# Altium PCB main.PcbDoc
Units mm, origin at the board's own origin, x right, y up, seen from the top; angles counter-clockwise.
Board outline 50 x 70 mm, 2 copper layers (Top Layer, Bottom Layer); 57 components, 51 nets, 162 pads, 66 vias.
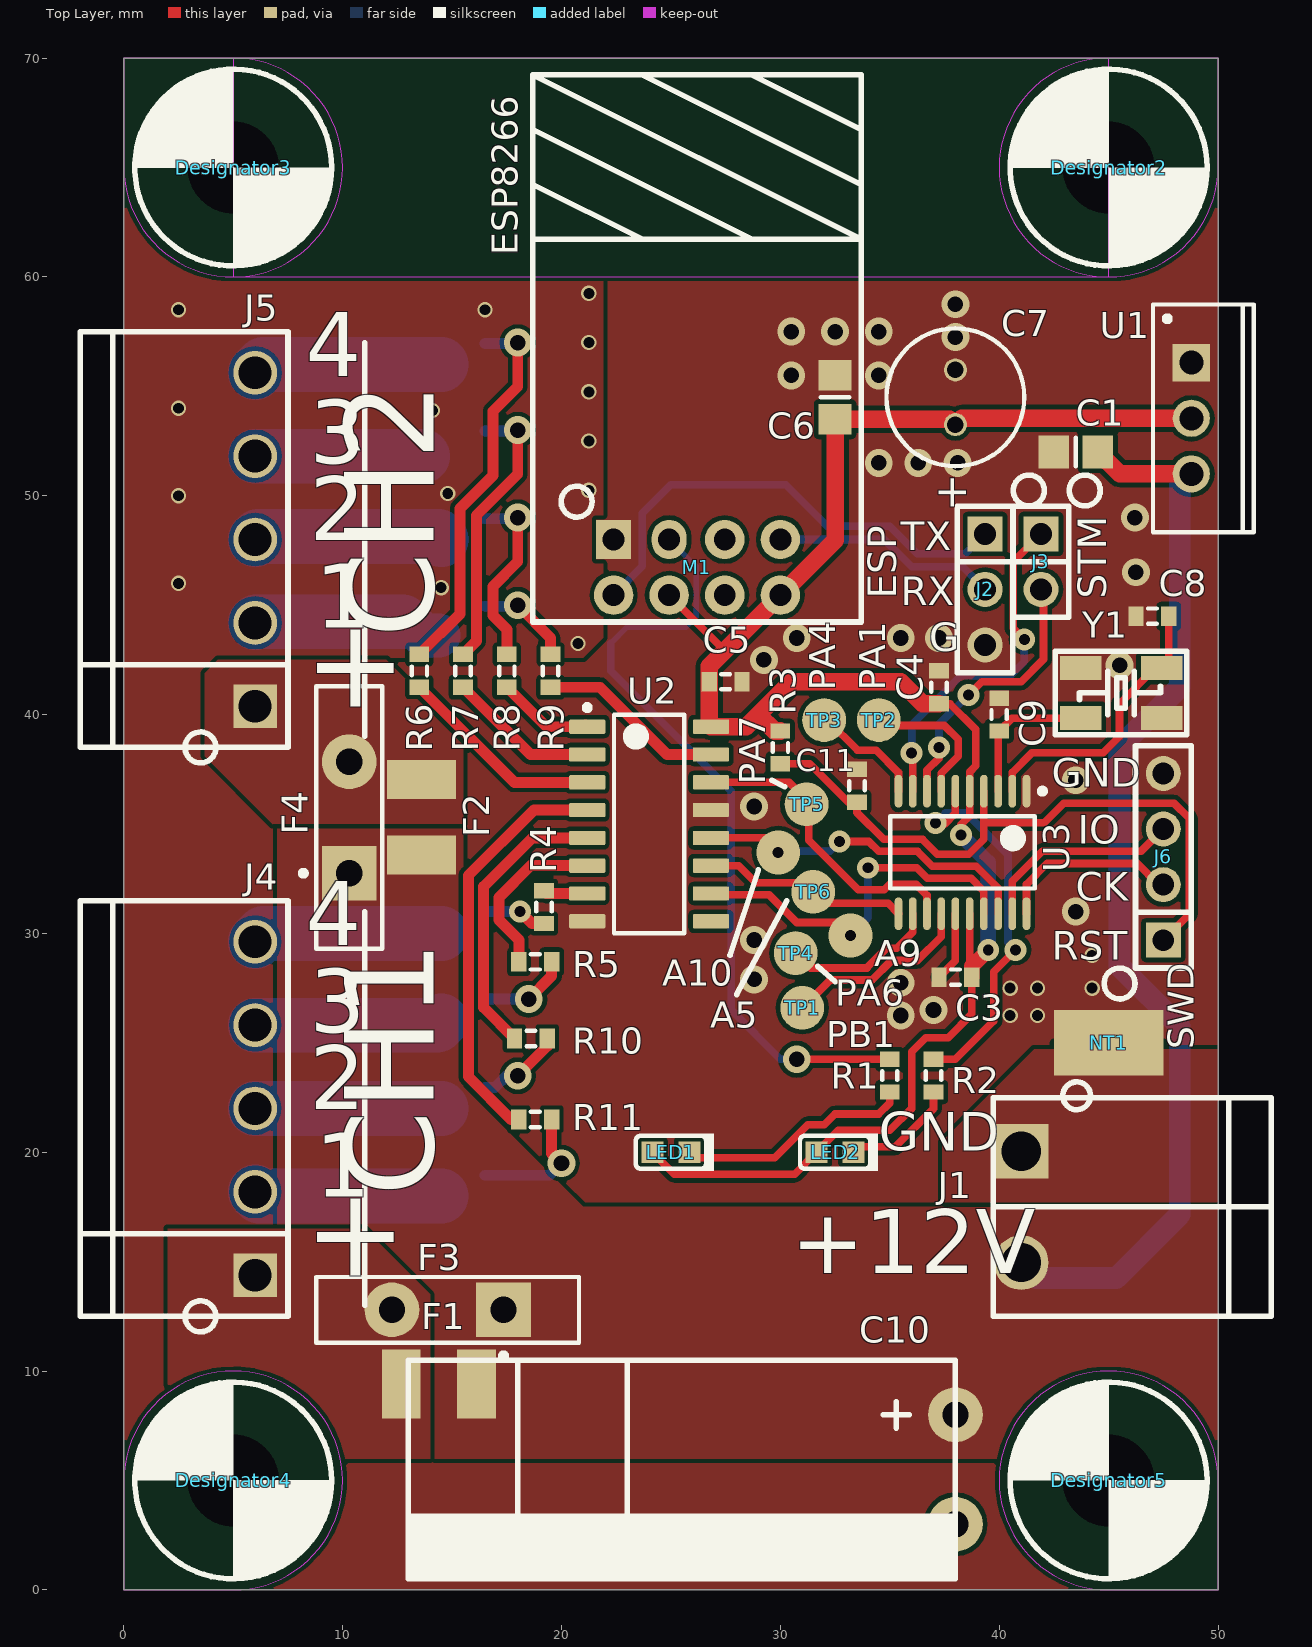
[diagram p0: Top Layer view]
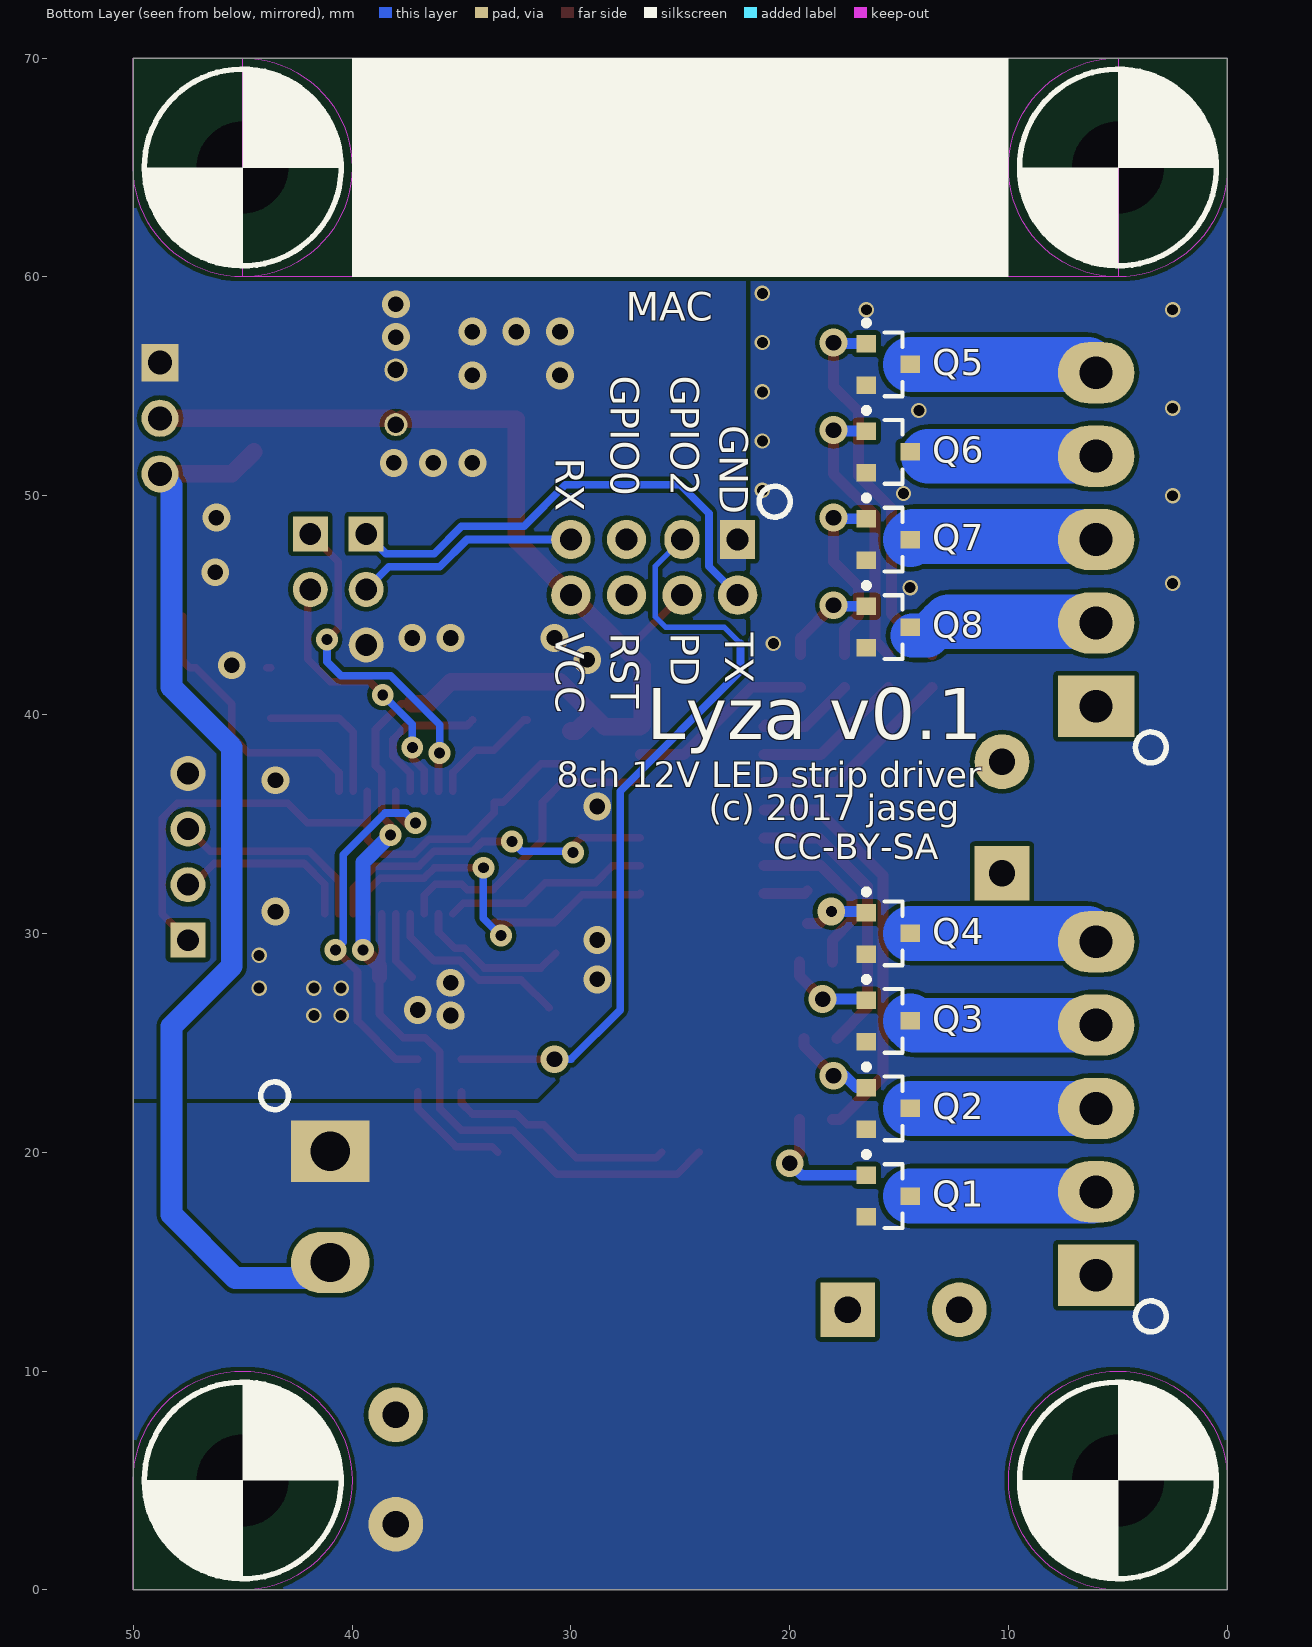
[diagram p1: Bottom Layer view, seen from below]

## Layer stack, top to bottom
Top Solder: solder mask 0.0102, Solder Resist, Dk 3.5
Top Layer: signal copper 0.0356
Dielectric 1: dielectric 0.32, FR-4, Dk 4.8
Bottom Layer: signal copper 0.0356
Bottom Solder: solder mask 0.0102, Solder Resist, Dk 3.5

## Board outline
0,0 0,70 50,70 50,0

## Design rules (kind name [scope] priority, off if disabled: settings)
Clearance [All] p1: gap=0.203 ignorepadtopadclearanceinfootprint=TRUE except(0: Arc-Hole Track-Hole SMDPad-Hole THPad-Hole Via-Hole Fill-Hole Poly-Hole Region-Hole Text-Hole)
ComponentClearance [All] p1 off: gap=0.254 collisioncheckmode=3 verticalgap=0.254 showdistances=FALSE
HoleSize [All] p1: absolutevalues=TRUE maxlimit=5 minlimit=0.025 maxpercent=80.000 minpercent=20.000
MinimumSolderMaskSliver [All] p1 off: minsoldermaskwidth=0.254
PolygonConnect PolygonConnect_Power [All vs InNetClass('power')] p1: connectstyle=Direct reliefconductorwidth=0.254 reliefentries=4 polygonreliefangle="90 Angle" airgapwidth=0.254
PolygonConnect [All] p2: connectstyle=Relief reliefconductorwidth=0.254 reliefentries=4 polygonreliefangle="90 Angle" airgapwidth=0.254
RoutingVias [All] p1: holewidth=0.711 width=1.27 viastyle="Through Hole" minholewidth=0.3 minwidth=0.5 maxholewidth=2 maxwidth=2.54
SilkToSilkClearance [All] p1 off: silktosilkclearance=0.254
SilkToSolderMaskClearance [IsPad] p1 off: minsilkscreentomaskgap=0.254 clearancetoexposedcopper=TRUE
SolderMaskExpansion [All] p1: expansion=0.102
Width [All] p1: maxlimit=5 minlimit=0.152 preferedwidth=0.254
25 further rules are at their usual default settings.

## Classes and differential pairs
component class main: C1 C3 C4 C5 C6 C7 C8 C9 C10 C11 F1 F2 F3 F4 J1 J2 J3 J4 J5 J6 LED1 LED2 M1 NT1 Q1 Q2 Q3 Q4 Q5 Q6 Q7 Q8 R1 R2 R3 R4 R5 R6 R7 R8 R9 R10 R11 TP1 TP2 TP3 TP4 TP5 TP6 U1 U2 U3 Y1
net class power: +12V FUSED1 FUSED2 GND PGND

## Components (designator, comment, footprint, x,y, rotation, side; value= is the part's Value field where it differs from the comment)
C1 "10u" 6-0805_M 43.5,52 r180 top
C3 "100n" J1-0603 38,28 r180 top
C4 "100n" J1-0603 37.25,41.25 r90 top
C5 "100n" J1-0603 27.5,41.5 r0 top
C6 "1u" 6-0805_M 32.5,54.5 r90 top
C7 "100u" FHTE-8-AA07-2_L 38,54.5 r270 top
C8 "22p" J1-0603 47,44.5 r0 top
C9 "22p" J1-0603 40,40 r90 top
C10 "1000/25" ELKO_10MM_RM5_SIDE_25MM 38,5.5 r270 top
C11 "47n" J1-0603 33.5,36.75 r90 top
Designator2 "Comment" M4_SCREW 45,65 r0 top
Designator3 "Comment" M4_SCREW 5,65 r0 top
Designator4 "Comment" M4_SCREW 5,5 r0 top
Designator5 "Comment" M4_SCREW 45,5 r0 top
F1 "1812L260" LFUS-FUSE1812-71_V 14.4,9.4 r180 top
F2 "1812L260" LFUS-FUSE1812-71_V 13.6,35.3 r90 top
F3 "MF-R185" BOUR-MF-R185 14.8,12.8 r180 top
F4 "MF-R185" BOUR-MF-R185 10.3,35.3 r90 top
J1 "2P5.08MM" HEADER_2PIN_RM5.08MM_PLUGGABLE 41,17.5 r0 top
J2 "PINHD_1x3_2.54MM" PINHD_3X1_2.54MM 39.356,45.72 r0 top
J3 "PINHD_1x2_2.54MM" PINHD_2X1_2.54MM 41.91,46.99 r0 top
J4 "5PIN3.81MM" HEADER_5PIN_RM3.81MM_PLUGGABLE 6,22 r180 top
J5 "5PIN3.81MM" HEADER_5PIN_RM3.81MM_PLUGGABLE 6,48 r180 top
J6 "SWD" PINHD_4X1_2.54MM 47.5,33.5 r180 top
LED1 "KP-1608MGC" KING-0603LED_GREEN_V 25,20 r180 top
LED2 "KP-1608MGC" KING-0603LED_GREEN_V 32.5,20 r180 top
M1 "ESP-01" ESP01 26.19,46.73 r90 top locked
NT1 "NETTIE" NETTIE 45,25 r180 top
Q1 "IRLML6244TRPbF" ONSC-SOT-23-3-318-08_V 15.5,18 r180 bottom
Q2 "IRLML6244TRPbF" ONSC-SOT-23-3-318-08_V 15.5,22 r180 bottom
Q3 "IRLML6244TRPbF" ONSC-SOT-23-3-318-08_V 15.5,26 r180 bottom
Q4 "IRLML6244TRPbF" ONSC-SOT-23-3-318-08_V 15.5,30 r180 bottom
Q5 "IRLML6244TRPbF" ONSC-SOT-23-3-318-08_V 15.5,56 r180 bottom
Q6 "IRLML6244TRPbF" ONSC-SOT-23-3-318-08_V 15.5,52 r180 bottom
Q7 "IRLML6244TRPbF" ONSC-SOT-23-3-318-08_V 15.5,48 r180 bottom
Q8 "IRLML6244TRPbF" ONSC-SOT-23-3-318-08_V 15.5,44 r180 bottom
R1 "180" J1-0603 35,23.5 r270 top
R2 "180" J1-0603 37,23.5 r270 top
R3 "47k" J1-0603 30,38.5 r90 top
R4 "180" J1-0603 19.2,31.2 r90 top
R5 "180" J1-0603 18.8,28.7 r180 top
R6 "180" J1-0603 13.5,42 r270 top
R7 "180" J1-0603 15.5,42 r270 top
R8 "180" J1-0603 17.5,42 r270 top
R9 "180" J1-0603 19.5,42 r270 top
R10 "180" J1-0603 18.6,25.2 r180 top
R11 "180" J1-0603 18.8,21.5 r180 top
TP1 "PB1" TESTPOINT_2mm 31,26.6 r0 top
TP2 "PA1" TESTPOINT_2mm 34.5,39.75 r0 top
TP3 "PA4" TESTPOINT_2mm 32,39.75 r0 top
TP4 "PA6" TESTPOINT_2mm 30.7,29.1 r0 top
TP5 "PA6" TESTPOINT_2mm 31.2,35.9 r0 top
TP6 "PA6" TESTPOINT_2mm 31.5,31.9 r0 top
U1 "LD1117AV33" TO220 48.779,53.54 r270 top
U2 "SN74HC595DR" D0016A_M 24,35 r0 top
U3 "STM32F030F4P6" STM-TSSOP20_L 38.325,33.7 r270 top
Y1 "ABM3B-8.0000MHZ-B2-T" XTAL_MJ_5x3.2 45.571,40.988 r180 top

## Footprints (in the part's own frame and the unit in brackets; to place one, negate y for a bottom-side part, rotate by r counter-clockwise, add the part's x,y. Pads: shape width x height; smd on the part's side, far side on the other; paste and mask are expansions set on the pad)
6-0805_M [mm] "Chip Resistor, Body 2.0x1.2mm, IPC Low Density"
  rect 1.4x1.5 smd: 1(-1,0) 2(1,0)
  silkscreen extent 0,-0.65 0,0.65, body extent -1.07,-0.7 1.07,0.7, height 0.7
BOUR-MF-R185 [mm] "THD, 2-Leads, Body 12x3mm"
  rect 2.5x2.5 hole 1.2: 1(-2.55,0)
  round 2.5 hole 1.2: 2(2.55,0)
  silkscreen extent -6,-1.5 6,2.22, body extent -6,-1.48 6,1.52, height 18.4
D0016A_M [mm] "SOIC, 16-Leads, Body 10x4mm, Pitch 1.27mm, IPC Low Density"
  rrect15% 1.65x0.65 smd: 1(-2.825,4.445) 2(-2.825,3.175) 3(-2.825,1.905) 4(-2.825,0.635) 5(-2.825,-0.635) 6(-2.825,-1.905) 7(-2.825,-3.175) 8(-2.825,-4.445) 9(2.825,-4.445) 10(2.825,-3.175) 11(2.825,-1.905) 12(2.825,-0.635) 13(2.825,0.635) 14(2.825,1.905) 15(2.825,3.175) 16(2.825,4.445)
  silkscreen extent -2.95,-5 1.6,5.44, body extent -3,-4.95 3,4.95, height 1.59
ELKO_10MM_RM5_SIDE_25MM [mm]
  round 2.5 hole 1.2: 1(-2.5,0) 2(2.5,0)
  silkscreen extent -5,-25 5,0
ESP01 [mm] "ESP-01 ESP8266 Wifi Module"
  rect 1.8x1.6 hole 1: 1(1.27,3.81)
  round 1.8 hole 1: 2(-1.27,3.81) 4(-1.27,1.27) 5(1.27,-1.27) 6(-1.27,-1.27) 7(1.27,-3.81) 8(-1.27,-3.81)
  oval 1.8x1.6 hole 1: 3(1.27,1.27)
  silkscreen extent -2.5,-7.5 22.5,7.5
FHTE-8-AA07-2_L [mm] "Through Hole Cap, 2-Leads, Dia 6.3mm, Body Length 7mm, IPC High Density"
  round 1.05 hole 0.75: 1(1.25,0) 2(-1.25,0)
  silkscreen extent -3.15,-3.15 3.15,3.15, body extent -3.15,-3.16 3.15,3.16, height 7
HEADER_2PIN_RM5.08MM_PLUGGABLE [mm] "Pluggable Header 2 pin RM 5.08mm"
  rect 2.5x2.5 / inner round 3.6 / far side rect 3.6x2.8 hole 1.8: 1(0,2.54)
  round 2.5 / inner round 3.6 / far side oval 3.6x2.8 hole 1.8: 2(0,-2.54)
  silkscreen extent -1.27,-5 11.43,5.71
HEADER_5PIN_RM3.81MM_PLUGGABLE [mm] "Pluggable Header 5 pin RM 3.81mm"
  rect 2x2 / inner oval 4x3 / far side rect 3.5x2.8 hole 1.5: 1(0,7.62)
  round 2 / inner oval 4x3 / far side oval 3.5x2.8 hole 1.5: 2(0,3.81) 3(0,0) 4(0,-3.81) 5(0,-7.62)
  silkscreen extent -1.5,-9.5 8,10.21
J1-0603 [mm] "Chip Resistor, Body 1.6x0.8mm, IPC High Density"
  rect 0.7x0.9 smd: 1(-0.75,0) 2(0.75,0)
  silkscreen extent -0.2,-0.35 0.2,0.35, body extent -0.85,-0.48 0.85,0.48, height 0.9
KING-0603LED_GREEN_V [mm] "SMT LED, 2-Leads, Body 1.6x0.8mm (0603-Size)"
  rect 1x1 smd paste+0 mask+0: 1(0.85,0) 2(-0.85,0)
  silkscreen extent -1.97,-0.85 1.6,0.85, body extent -0.92,-0.53 1.09,0.53, height 1.1
LFUS-FUSE1812-71_V [mm] "Chip Fuse, Body 4.73x3.41mm, Height 0.71mm"
  rect 1.78x3.15 smd: 1(-1.725,0) 2(1.725,0)
  body extent -1.73,-1.57 1.73,1.57, height 0.71
M4_SCREW [mm] "Hole for M4 screw with head"
  round 0 hole 4.2 unplated: 1(0,0)
  silkscreen extent -4.5,-4.5 4.5,4.5
NETTIE [mm] "Net tie"
  rect 5x1.5 smd: 1(0,0.75)
  rect 5x1.5 smd paste-50 mask-50: 2(0,-0.75)
ONSC-SOT-23-3-318-08_V [mm] "SOT23, 3-Leads, Body 2.92x1.3mm, Pitch 0.95mm"
  rect 0.9x0.8 smd: 1(-1,0.95) 2(-1,-0.95) 3(1,0)
  silkscreen extent -1.13,-1.46 0.65,2.02, body extent -0.65,-1.46 0.65,1.46, height 1.11
PINHD_2X1_2.54MM [mm] "Pin Header 1 row 2 pin RM 2.54mm"
  rect 1.6x1.6 hole 1: 1(0,1.27)
  round 1.6 hole 1: 2(0,-1.27)
  silkscreen extent -1.27,-2.54 2.71,3.96
PINHD_3X1_2.54MM [mm] "Pin Header 1 row 3 pin RM 2.54mm"
  rect 1.6x1.6 hole 1: 1(0,2.54)
  round 1.6 hole 1: 2(0,0) 3(0,-2.54)
  silkscreen extent -1.27,-3.81 2.71,5.23
PINHD_4X1_2.54MM [mm] "Pin Header 1 row 4 pin RM 2.54mm"
  rect 1.6x1.6 hole 1: 1(0,3.81)
  round 1.6 hole 1: 2(0,1.27) 3(0,-1.27) 4(0,-3.81)
  silkscreen extent -1.27,-5.08 2.7,6.5
STM-TSSOP20_L [mm] "SOP, 20-Leads, Body 6.6x4.5mm, Pitch 0.65mm, IPC High Density"
  oval 1.5x0.35 smd: 1(-2.8,2.925) 2(-2.8,2.275) 3(-2.8,1.625) 4(-2.8,0.975) 5(-2.8,0.325) 6(-2.8,-0.325) 7(-2.8,-0.975) 8(-2.8,-1.625) 9(-2.8,-2.275) 10(-2.8,-2.925) 11(2.8,-2.925) 12(2.8,-2.275) 13(2.8,-1.625) 14(2.8,-0.975) 15(2.8,-0.325) 16(2.8,0.325) 17(2.8,0.975) 18(2.8,1.625) 19(2.8,2.275) 20(2.8,2.925)
  silkscreen extent -2.92,-3.3 1.65,3.78, body extent -2.25,-3.3 2.25,3.3, height 1.2
TESTPOINT_2mm [mm] "Testpoint SMD 2mm dia"
  round 2 smd: 1(0,0)
TO220 [mm] "TO, Thru-Hole, Vertical, Heatsink Mounted; 3 In-Line Leads; Pitch 2.54 mm"
  rect 1.7x1.7 hole 1.1: 1(-2.54,0)
  round 1.7 hole 1.1: 2(0,0) 3(2.54,0)
  silkscreen extent -5.2,-1.75 5.2,2.85, body extent -5.25,-1.8 5.25,2.9, height 19.7
XTAL_MJ_5x3.2 [mm]
  rect 1.9x1.1 smd: 1(-1.85,-1.15) 2(1.85,-1.15) 3(1.85,1.15) 4(-1.85,1.15)
  silkscreen extent -3,-1.9 3,1.9

## Part data
C1 C3 C4 C5 C6 C8 C9 C11: library part C, "Capacitor"
C7: library part CMP-0909-00002-1, "Aluminum Electrolytic Capacitor, 470 uF +/- 5%, 16 V, -40 to 105 degC, 2 Pin THD, Dia 6.3 mm, Body Length 7 mm, Tape and Reel", Manufacturer="Fenghuang Technology", Nominal Capacitance="470 uF", Operating Temperature="-40 to 105 degC", PartNumber=8471LCJAA07WPN081T, Seeve Color=Balck, Tolerance="+/- 5%", Voltage="16 V", ComponentLink1Description="Manufacturer URL", ComponentLink1URL=http://www.fenghua-advanced.com/, ComponentLink2Description=Datasheet, ComponentLink2URL=http://218.15.223.226:8089/BusinessProductPdf/ss_20130228152314.pdf, DatasheetVersion=Feb-13, Mounting Technology="Through Hole", PackageDescription="2-Pin Through Hole Cap, Dia 6.3 mm, Body Length 7 mm", PackageReference=8-AA07-2, Packing="Tape and Reel"
C10: library part ELKO, Mfg Part No=EEUFR1E102B, Mfg=Panasonic
F1 F2: library part CMP-0257-00001-1, "Resettable PTC, 1812, 1.5 A Ihold, 3.0 A Itrip", PartNumber=1812L150ZR, ComponentLink1Description="Manufacturer URL", ComponentLink1URL=http://www.littelfuse.com/, ComponentLink2Description=Datasheet, ComponentLink2URL=http://www.littelfuse.com/products/resettable-ptcs/surface-mount/1812l/~/media/Electronics_Technical/Datasheets/Resettable_PTCs/Littelfuse_PTC_1812L_Datasheet.pdf, DatasheetVersion=6/2012, Ihold="1.5 A", Imax="100 A", Itrip="3 A", PackageDescription="2-Pin SMT Fuse, 4.55 x 3.24 mm Body", PackageReference=FUSE1812-71, PackageVersion=6/2012, Vmax="8 Vdc"
F3 F4: library part CMP-2000-06695-1, "PTC Resettable Fuse, 30 V, 40 A, -40 to 85 degC, 2-Pin THD, RoHS, Bulk", Hold Current=1.85A, Manufacturer=Bourns, Maximum Current Rating=40A, Maximum Initial Resistance=0.07Ohm, Maximum Post Trip Resistance=0.11Ohm, Maximum Voltage Rating=30V, Minimum Initial Resistance=0.04Ohm, Operating Temperature=-40to85C, Package/Case=N/A, Package Description="2-Pin Through Hole Device, Body 12 x 3 mm", Trip Current=3.7A, Typical Power Dissipation=1W, Agency Approvals=CSA/TUV/UL, Applications=AutomotiveApplications,ComputersandPeripherals,GeneralElectronics, COO=CN, Datasheet URL=http://www.bourns.com/docs/Product-Datasheets/mfr.pdf, Datasheet Version=08/2015, Dimension=3(Max)x12(Max)mm, ECCN=EAR99, Family=MF-R, HTS=8536100040, Lead Diameter=0.51mm, Manufacturer URL=http://www.bourns.com/, Maximum Trip Time=8.7@9.25As, Mounting=ThroughHole, Mounting Technology=ThroughHole, Number of Terminals=2, Package Reference=MF-R185, Packaging=Bulk, Part No=MF-R185, RoHS=Yes, Seated Plane Height=18.4(Max)mm, Supplier=Bourns, Supplier Standard Pack=500, Terminal Pitch=5.1(Nom)mm, Wire Form=InsideCrimpStandoff
J1: library part PHD2P5.08RM, "Pluggable Header 2 Pin RM 5.08mm ~15A"
J2: library part PINHD1X3, "Pin Header 1 row 3 pin RM 2.54mm"
J3: library part PINHD1X2, "Pin Header 1 row 2 pin RM 2.54mm"
J4 J5: library part PHD5P3.81RM, "Pluggable Header 5 Pin RM 3.81mm ~8A"
J6: library part PH_4x1, "Pin Header 4x1 pin"
LED1 LED2: library part CMP-0404-00001-1, "LED, SMT, 0603(1608), 1.1mm thickness, Green", Forward Current="30 mA", Manufacturer=Kingbright, Power Dissipation="75 mW", Reverse Voltage="5 V", Storage Temperature="-40 to +85 degC", ComponentLink1Description="Manufacturer URL", ComponentLink1URL=http://www.kingbright.com/, Mounting Technology="Surface Mount", PackageDescription="2-Pin SMT LED, 1.6 x 0.8 mm Pitch", PackageReference=0603LED_GREEN, Packing Type="2000 pcs / reel", PartNumber=KP-1608MGC
M1: library part ESP01, "ESP-01 ESP8266 Wifi Module"
Q1 Q2 Q3 Q4 Q5 Q6 Q7 Q8: library part CMP-1058-00794-1, "Power MOSFET, 500 mA, 60 V, N-Channel, 3-Pin SOT-23, Pb-Free, Tape and Reel", Manufacturer="On Semiconductor", Package Type=SOT-23-3, PartNumber=NVBF170LT1G, Channel Polarity="N Channel", ComponentLink1Description="Manufacturer URL", ComponentLink1URL=http://www.onsemi.com/, ComponentLink2Description=Datasheet, ComponentLink2URL=http://www.onsemi.cn/pub_link/Collateral/MMBF170LT1-D.PDF, ComponentLink3Description="Package Specification", ComponentLink3URL=http://www.onsemi.cn/pub_link/Collateral/318-08.PDF, Configuration=Single, DatasheetVersion="Rev. 9", ID Max (A)=0.5, Mounting Technology="Surface Mount", PackageDescription="3-Pin Small Outline Transistor, Body 2.92 x 1.3 mm, Pitch 0.95 mm", PackageReference=SOT-23-3-318-08, PackageVersion="Rev. AP, 11/2009", Packing="Tape and Reel", PD Max (W)=0.225, RoHS=Pb-Free, V(BR)DSS Min (V)=60, VGS(th) Max (V)=3, VGS Max (V)=20
R1 R2 R3 R4 R5 R6 R7 R8 R9 R10 R11: library part R, "Resistor"
TP1 TP2 TP3 TP4 TP5 TP6: library part TESTPOINT, "Testpoint"
U1: library part CMP-0244-00460-1, "1A, Low Drop Positive Voltage Regulator, 3.3V, 3-Pin TO-220", ComponentLink1Description="Manufacturer URL", ComponentLink1URL=http://www.st.com, ComponentLink2Description=Datasheet, ComponentLink2URL=http://www.st.com/internet/com/TECHNICAL_RESOURCES/TECHNICAL_LITERATURE/DATASHEET/CD00002116.pdf, ComponentLink3Description="Package Specification", ComponentLink3URL=http://www.st.com/internet/com/TECHNICAL_RESOURCES/TECHNICAL_LITERATURE/PACKAGE_INFORMATION/CD00004649.pdf, DatasheetVersion=2/12/2011, PackageDescription="TO, Thru-Hole, Vertical, Heatsink Mounted; 3 In-Line Leads; Pitch 2.54 mm", PackageReference=TO220, PackageVersion=ver3.0
U2: library part CMP-0780-00037-3, "8-Bit Shift Registers With 3-State Output Registers, D0016A, LARGE T&R", F @ Nom Voltage(Max)(Mhz)=28, Generic Part Number=SN74HC595, ICC @ Nom Voltage(Max)(mA)=0.08, Manufacturer="Texas Instruments", Operating Temperature Range(C)="-40 to 85", Rating=Military, tpd @ Nom Voltage(Max)(ns)=34, Voltage(Nom)(V)=6, 3-State Output=Yes, Bits=4, Code_JEDEC="MS-012 variation AC", DatasheetVersion=SCLS041H, Input Type=CMOS, Output Drive (IOL/IOH)(Max)(mA)=7.8/-7.8, Output Type=CMOS, PackageReference=D0016A, PackageVersion=http://www.ti.com/lit/ml/mpds178g/mpds178g.pdf, Technology Family=HC, VCC(Max)(V)=6, VCC(Min)(V)=2
U3: library part CMP-0304-00039-2, "ARM Cortex-M0 32-bit MCU, 16 KB Flash, 4 KB Internal RAM, 15 I/Os, 20-pin TSSOP, -40 to 85 degC, Tube", I/Os (High Current)=15, Operating Frequency(F) (Processor speed) (MHz)=48, Supply Voltage(Vcc) min (V)=2.4, ComponentLink1Description="Manufacturer URL", ComponentLink1URL=http://www.st.com/web/en/home.html, ComponentLink2Description=Datasheet, ComponentLink2URL=http://www.st.com/st-web-ui/static/active/en/resource/technical/document/datasheet/DM00088500.pdf, ComponentLink3Description="Package Specification", ComponentLink3URL=http://www.st.com/st-web-ui/static/active/en/resource/technical/document/datasheet/DM00065136.pdf, Core="ARM Cortex-M0", DatasheetVersion="Rev. 1", FLASH Size (Prog) (kB)=16, Internal RAM Size (kB)=4, Mounting Technology="Surface Mount", PackageDescription="20-Pin Thin Shrink Small Outline Package, 6.5 x 4.4 mm Body, 0.65 mm Pitch", PackageReference=TSSOP20, PackageVersion="Rev. 1, 11/2012", Packing=Tube, PartNumber=STM32F030F4P6
Y1: library part ABRA-ABM3B-4, "Crystal, SMD, 25.000000MHz Stab=50ppm 18.0pF", Case Size="5.0 x 3.2 mm", Manufacturer=Abracon, PartNumber=ABM3B-25.000MHZ-B2-T, Storage Temperature="-40 to 80 degC", Body Shape=Rectangular, ComponentLink1Description="Manufacturer URL", ComponentLink1URL=http://www.abracon.com/, ComponentLink2Description=Datasheet, ComponentLink2URL=http://www.abracon.com/Resonators/abm3b.pdf, DatasheetVersion=Apr-13, Mounting Technology="Surface Mount", Note="Take care of different package scales", PackageDescription="4-Pin SMT Crystal, 5.2 x 3.4 mm Body", PackageReference=ABM3B, Packing Type="Tape & Reel"

## Via types
v1: diameter 1.27, hole 0.711, Top Layer to Bottom Layer, tented both sides, 25 vias
v2: diameter 0.7, hole 0.5, Top Layer to Bottom Layer, tented both sides, 20 vias
v3: diameter 1, hole 0.5, Top Layer to Bottom Layer, tented both sides, 10 vias
v4: diameter 1.27, hole 0.711, Top Layer to Bottom Layer, 7 vias
v5: diameter 2/1 (per signal layer), hole 0.5, Top Layer to Bottom Layer, tented bottom, 2 vias
v6: diameter 1.27, hole 0.711, Top Layer to Bottom Layer, tented bottom, 1 vias
v7: diameter 1/1.27 (per signal layer), hole 0.5, Top Layer to Bottom Layer, tented top, 1 vias

## Nets (pads, with @x,y where several pads share a name; then routed paths per layer and width w, separated by ;. In a path a pad name is that pad's centre, name@x,y a point inside that pad or via, vN(x,y) a via of type N, cw(c..) or ccw(c..) an arc to the next point about the centre after c; other vN are vias at no path point)
+12V: C1.1 C10.1 F1.1 F2.1 F3.1 F4.1 J1.2 U1.3 | length 49.8
  Top Layer w0.8: C1.1 45.5,51 U1.3
  Bottom Layer w1: J1.2 41.71,14.25 45.342,14.25 48.25,17.158 48.25,25.75 45.5,28.5 45.5,38.5 48.25,41.25 48.25,50.471 U1.3
CH0: J4.5 Q4.3 | length 8.7
  Bottom Layer w2.5: J4.5 6.38,30 Q4.3
CH1: J4.4 Q3.3 | length 8.6
  Bottom Layer w2.5: J4.4 14.31,25.81 Q3.3
CH2: J4.3 Q2.3 | length 8.5
  Bottom Layer w2.5: J4.3 Q2.3
CH3: J4.2 Q1.3 | length 8.6
  Bottom Layer w2.5: J4.2 6.19,18 Q1.3
CH4: J5.5 Q5.3 | length 8.7
  Bottom Layer w2.5: J5.5 6.38,56 Q5.3
CH5: J5.4 Q6.3 | length 7.7
  Bottom Layer w2.5: J5.4 13.665,51.81
CH6: J5.3 Q7.3 | length 8.6
  Bottom Layer w2.5: J5.3 6.139,48.139 14.361,48.139 Q7.3
CH7: J5.2 Q8.3 | length 8.7
  Bottom Layer w2: 12.737,44.237 13.091,44.237 13.718,43.611 Q8.3@14.389,43.611
  Bottom Layer w2.5: J5.2 6.047,44.237 12.737,44.237
CLR: U2.10 U3.17 | length 18.2
  Top Layer w0.35: U2.10 26.881,31.769 29.481,31.769 30.75,30.5 33.5,30.5 33.2,30.2 v5(33.2,29.9) ; v3(34,33) 36.232,33 36.717,32.515 38.716,32.515 39.3,31.931 U3.17
  Bottom Layer w0.35: v5(33.2,29.9) 34,30.7 v3(34,33)
FUSED1: F1.2 F3.2 J4.1
FUSED2: F2.2 F4.2 J5.1
GATE0: R4.2 U2.7 | length 2
  Top Layer w0.5: R4.2 19.325,31.825 U2.7
GATE1: R5.2 U2.6 | length 7.9
  Top Layer w0.5: R5.2 18.05,29.702 17.147,30.605 17.147,31.647 18.595,33.095 U2.6
GATE2: R10.2 U2.5 | length 13.2
  Top Layer w0.5: R10.2 16.444,26.606 16.444,32.144 18.665,34.365 U2.5
GATE3: R11.2 U2.4 | length 19
  Top Layer w0.5: R11.2 17.7,21.5 15.74,23.46 15.74,32.64 18.735,35.635 U2.4
GATE4: R6.2 U2.3 | length 9.5
  Top Layer w0.5: R6.2 17.845,36.905 U2.3
GATE5: R7.2 U2.2 | length 6.9
  Top Layer w0.5: R7.2 18.575,38.175 U2.2
GATE6: R8.2 U2.1 | length 4.5
  Top Layer w0.5: R8.2 19.305,39.445 U2.1 U2.1@21.1,39.52
GATE7: R9.2 U2.15 | length 8.6
  Top Layer w0.5: R9.2 21.75,41.25 24.825,38.175 U2.15
GND: C1.2 C3.2 C4.2 C5.2 C6.2 C7.2 C8.1 C9.2 C11.2 J2.3 J6.4 M1.1 NT1.2 U1.1 U2.8 U2.13 U3.1 U3.15 Y1.2 Y1.4 | length 3.4
  Top Layer w0.35: C3.2 38,28.75 U3.15 ; Y1.2 Y1.2@43.888,42.138
  other v1: 35.5,26.25 37,26.5 35.5,27.75 28.8,27.9 28.8,29.7 43.5,31 28.8,35.8 43.5,37 45.5,42.25 29.25,42.5 30.75,43.5 35.5,43.5 37.25,43.5 46.25,46.5 46.2,49 34.5,51.5 36.3,51.5 38.1,51.5 30.5,55.5 34.5,55.5 38,57.25 30.5,57.5 32.5,57.5 34.5,57.5 38,58.75
  other v2: 40.5,26.25 41.75,26.25 40.5,27.5 41.75,27.5 44.25,27.5 44.25,29
MOSI: TP5.1 U2.14 U3.13 | length 14.1
  Top Layer w0.35: U2.14 30.395,36.905 31.3,36 31.3,34.265 33.565,32 34.742,32 34.992,32.25 36.2,32.25 36.7,31.75 U3.13
NetLED1_2: LED1.2 R1.2 | length 10.8
  Top Layer w0.35: LED1.2 26.1,19.75 29.75,19.75 31.25,21.25 32,21.25 32.5,21.75 34.5,21.75 35,22.25 R1.2
NetLED2_2: LED2.2 R2.2 | length 5.2
  Top Layer w0.35: LED2.2 33.6,20.25 35.25,20.25 37,22 R2.2
NetQ1_1: Q1.1 R11.1 | length 5.9
  Top Layer w0.5: R11.1 19.55,19.95 v4(20,19.5)
  Bottom Layer w0.5: Q1.1 19.45,18.95 v4(20,19.5)
NetQ2_1: Q2.1 R10.1 | length 4
  Top Layer w0.5: v4(18,23.5) 19.35,24.85 R10.1
  Bottom Layer w0.5: Q2.1 16.95,22.95 17.5,23.5 v4(18,23.5)
NetQ3_1: Q3.1 R5.1 | length 4.2
  Top Layer w0.5: v4(18.5,27) 19.55,28.05 R5.1
  Bottom Layer w0.5: Q3.1 16.55,27 v4(18.5,27)
NetQ4_1: Q4.1 R4.1 | length 2.9
  Top Layer w0.5: v7(18.1,31) 18.65,30.45 R4.1
  Bottom Layer w0.5: Q4.1 16.55,31 v7(18.1,31)
NetQ5_1: Q5.1 R6.1 | length 17.6
  Top Layer w0.5: R6.1 15.353,44.603 15.353,49.419 16.861,50.927 16.861,53.861 18,55 v4(18,57)
  Bottom Layer w0.5: Q5.1 17.95,56.95 v4(18,57)
NetQ6_1: Q6.1 R7.1 | length 12.8
  Top Layer w0.5: R7.1 16.107,43.357 16.107,49.107 18,51 v4(18,53)
  Bottom Layer w0.5: Q6.1 17.95,52.95 v4(18,53)
NetQ7_1: Q7.1 R8.1 | length 8.5
  Top Layer w0.5: R8.1 17.5,43.889 16.861,44.528 16.861,45.861 18,47 v4(18,49)
  Bottom Layer w0.5: Q7.1 17.95,48.95 v4(18,49)
NetQ8_1: Q8.1 R9.1 | length 4.4
  Top Layer w0.5: v4(18,45) 19.5,43.5 R9.1
  Bottom Layer w0.5: Q8.1 17.95,44.95 v4(18,45)
NetTP1_1: TP1.1 U3.14 | length 8.7
  Top Layer w0.35: TP1.1 32.269,27.869 34.186,27.869 35.08,28.763 36.263,28.763 37.35,29.85 U3.14
NetTP2_1: TP2.1 U3.7 | length 6.7
  Top Layer w0.35: TP2.1 34.75,39.5 37.492,39.5 38.128,38.864 38.128,38.096 37.35,37.318 U3.7
NetTP3_1: TP3.1 U3.10 | length 5.2
  Top Layer w0.35: TP3.1 32.15,39.75 33.528,38.372 34.378,38.372 35.4,37.35 U3.10
NetTP4_1: TP4.1 U3.12 | length 7.2
  Top Layer w0.35: TP4.1 31.378,28.422 33.957,28.422 34.851,29.316 35.316,29.316 36.05,30.05 U3.12
NLED1: R2.1 U3.6 | length 18
  Top Layer w0.35: R2.1 38,24.25 39.75,26 39.75,28.25 v3(40.75,29.25) ; v3(37.095,35.047) 37.453,35.047 37.5,35 38,35.5 U3.6
  Bottom Layer w0.35: v3(37.095,35.047) 37.548,35.5 38.5,35.5 40.4,33.6 40.4,29.6 v3(40.75,29.25)
NLED2: M1.3 R1.1 | length 35.7
  Top Layer w0.35: v6(30.75,24.25) R1.1
  Bottom Layer w0.254: 22.25,43.25 23,44 25.676,44 26.15,44.474 26.15,46.77 M1.3
  Bottom Layer w0.35: 22.25,43.25 22.25,42 27.75,36.5 27.75,26.5 30,24.25 v6(30.75,24.25)
PGND: C10.2 J1.1 NT1.1 Q1.2 Q2.2 Q3.2 Q4.2 Q5.2 Q6.2 Q7.2 Q8.2
  other v2: 20.75,43.25 14.5,45.8 2.5,46 2.5,50 14.8,50.1 21.25,50.25 21.25,52.5 14.1,53.9 2.5,54 21.25,54.75 21.25,57 2.5,58.5 16.5,58.5 21.25,59.25
RESET: C11.1 J6.1 R3.1 U3.4 | length 29.9
  Top Layer w0.35: R3.1 31.35,37.75 33.1,36 C11.1 33.5,35.524 34.721,34.303 36.494,34.303 37.175,33.622 38.614,33.622 39.3,34.308 39.3,35.05 ; U3.4 39.3,35.05 ; J6.1 48.678,30.868 48.678,35.258 47.988,35.948 42.948,35.948 42.05,35.05 39.3,35.05
RX_ESP: J2.2 M1.7 | length 10.3
  Bottom Layer w0.35: M1.7 34.75,48 36,46.75 38.326,46.75 J2.2
RX_STM: J3.1 U3.9 | length 16.1
  Top Layer w0.35: v3(36,38.25) 36.2,38.05 36.05,37.9 U3.9 ; v3(41.148,43.434) 40.64,43.942 40.64,46.99 J3.1
  Bottom Layer w0.35: v3(36,38.25) 36,39.542 38.236,41.778 40.508,41.778 41.148,42.418 v3(41.148,43.434)
SCLK: TP6.1 U2.11 U3.11 | length 9.5
  Top Layer w0.35: U2.11 28.105,33.095 28.878,32.322 31.178,32.322 32.122,31.378 34.922,31.378 U3.11
STROBE: U2.12 U3.18 | length 16.8
  Top Layer w0.35: U2.12 29.554,34.365 29.9,34.019 v5(29.9,33.7) ; v3(32.7,34.2) 34.042,34.2 34.492,33.75 36.265,33.75 36.946,33.069 38.945,33.069 39.95,32.064 U3.18
  Bottom Layer w0.35: v5@29.68,33.8 v5@29.859,33.979 ; v5(29.9,33.7) v5@29.9,33.75 ; v3(32.7,34.2) 32.25,33.75 v5@29.9,33.75 ; v5@29.9,33.75 29.9,33.938 29.712,33.75 v5@29.9,33.75
SWCLK: J6.2 U3.20 | length 8.4
  Top Layer w0.35: U3.20 41.25,32.25 42.197,33.197 46.303,33.197 47.27,32.23 J6.2
SWDIO: J6.3 U3.19 | length 9.4
  Top Layer w0.35: U3.19 40.6,32.382 41.968,33.75 46.48,33.75 J6.3
TX_ESP: J2.1 M1.2 | length 22.2
  Bottom Layer w0.35: M1.2 23.693,46.773 23.693,49.193 25,50.5 30.25,50.5 32.146,48.604 35,48.604 36.25,47.354 38.45,47.354 J2.1
TX_STM: J3.2 U3.8 | length 12.5
  Top Layer w0.35: U3.8 36.7,37.45 37.25,38 v3(37.25,38.5) ; v3(38.6,40.9) 39.2,41.5 41,41.5 42.026,42.526 42.026,45.604 J3.2
  Bottom Layer w0.35: v3(37.25,38.5) 37.25,39.55 v3(38.6,40.9)
VCC: C3.1 C4.1 C5.1 C6.1 C7.1 LED1.1 LED2.1 M1.4 M1.8 R3.2 U1.2 U2.16 U3.5 U3.16 | length 88.4
  Top Layer w0.35: LED1.1 25.15,19 30.65,19 LED2.1 32.65,21 35,21 36,22 36,24.585 36.652,25.237 37.67,25.237 38.75,26.317 C3.1 38.65,28.1 U3.16 ; M1.4 27.42,42.96 27.5,42.96 ; C4.1 37.75,40.5 38.931,39.319 38.931,37.657 38.65,37.376 U3.5 38.65,35.368 38.25,34.968 v3(38.25,34.5)
  Top Layer w0.7: C3.1 38.75,28.5 v3(39.5,29.25)
  Top Layer w0.8: R3.2 29.75,39.25 29,40 ; C4.1 36.5,40.5 35.5,41.5 30.5,41.5 29,40 ; U1.2 38.29,53.54 C7.1 37.75,53.5 C6.1 32.5,47.96 M1.8 27.5,42.96 26.75,42.21 C5.1 26.75,39.52 U2.16 28.445,39.445 29,40
  Bottom Layer w0.7: v3(38.25,34.5) 39.5,33.25 v3(39.5,29.25)
XT1: C8.2 U3.2 Y1.1 | length 13
  Top Layer w0.35: U3.2 40.6,37.35 41.5,38.25 44.75,38.25 45.5,39 45.5,40.5 47.138,42.138 Y1.1 47.75,42.467 C8.2
XT2: C9.1 U3.3 Y1.3 | length 6.7
  Top Layer w0.35: U3.3 39.95,39.2 C9.1 40.588,39.838 Y1.3
pads on no net: Designator2.1 Designator3.1 Designator4.1 Designator5.1 M1.5 M1.6 U2.9

## Polygon pours and split planes (outlines as drawn)
GND on Bottom Layer "GND_LOGIC_BOTTOM" (solid, pour order 22): 50,22.451 31.549,22.451 27.5,26.5 27.5,36.5 22,42 22,60.5 40.5,60.5 50,70
PGND on Bottom Layer "GND_POWER_BOTTOM" (solid, pour order 24): 50,0 0,0 0,70 50,70
FUSED1 on Top Layer "FUSED1_TOP" (solid, pour order 6): 2,16.5 11,16.5 14,13.5 14,6 4.5,6 2,8.5
FUSED2 on Top Layer "FUSED2_TOP" (solid, pour order 8): 3.7,41.9 4.3,42.5 12,42.5 15.5,39 15.5,35 6.8,35 3.7,38.1
PGND on Top Layer "PGND_INPUT_TOP" (solid, pour order 4): 37.4,17.7 37.4,20.5 41.6,24.7 50,24.7 50,17.707
+12V on Top Layer "12V_TOP" (solid, pour order 10): 7,6 14,6 38,6 40.5,6 50,6 50,17.5 21,17.5 15.5,23 15.5,35 7,35
PGND on Top Layer "PGND_TOP" (solid, pour order 18): 21.9,60 21.9,43.5 21,42.6 10,42.6 10,10 4.999,4.999 0,4.999 0,70 10,60
GND on Top Layer "GND_LOGIC_TOP" (solid, pour order 20): 0,70 50,70 50,0 0,0

## Keep-outs
Keep-Out Layer:
  region: 5,60 45,60 45,70 5,70
  region: 5,0 ccw(c5,5) 5,0 ccw(c5,5) 10,5 ccw(c5,5) 5,10 ccw(c5,5) 5,10 ccw(c5,5) 5,10 ccw(c5,5) 0,5 ccw(c5,5) 0,4.995 0,0 5,0 ccw(c5,5)
  region: 50,5 ccw(c45,5) 50,5 ccw(c45,5) 45,10 ccw(c45,5) 40,5 ccw(c45,5) 40,5 ccw(c45,5) 40,5 ccw(c45,5) 45,0 ccw(c45,5) 45.005,0 50,0 50,5 ccw(c45,5)
  region: 45,70 ccw(c45,65) 45,70 ccw(c45,65) 40,65 ccw(c45,65) 45,60 ccw(c45,65) 45,60 ccw(c45,65) 45,60 ccw(c45,65) 50,65 ccw(c45,65) 50,65.005 50,70 45,70 ccw(c45,65)
  region: 0,65 ccw(c5,65) 0,65 ccw(c5,65) 5,60 ccw(c5,65) 10,65 ccw(c5,65) 10,65 ccw(c5,65) 10,65 ccw(c5,65) 5,70 ccw(c5,65) 4.995,70 0,70 0,65 ccw(c5,65)

## Silkscreen, mask and mechanical layers (free items; w line width, h text height)
Top Overlay:
  lines w0.254: 11,13 11,31 ; 11,39 11,57 ; 27.7,29 29,32.9 ; 28,27.2 30.3,31.5 ; 29.6,37 30.2,36.7 ; 31.7,28.5 32.5,27.8
  text "ESP8266" at 18,61 h1.2 r90
  text "4" at 8.321,54.5 h5
  text "3" at 8.5,50.5 h5
  text "TX" at 35.5,47.5 h1.3
  text "2" at 8.498,47 h5
  text "ESP" at 35.3,45.3 h1.3 r90
  text "STM" at 44.9,45.3 h1.3 r90
  text "RX" at 35.5,45 h1.3
  text "CH2" at 15.5,43.5 h7 r90
  text "1" at 8.757,43 h5
  text "G" at 36.8,42.9 h1.3
  text "+" at 8.234,39 h7
  text "PA7" at 29.3,36.8 h1.2 r90
  text "GND" at 42.4,36.7 h1.3
  text "IO" at 43.6,34.1 h1.3
  text "CK" at 43.5,31.5 h1.3
  text "RST" at 42.4,28.8 h1.3
  text "4" at 8.321,28.5 h5
  text "A9" at 34.3,28.5 h1.2
  text "A10" at 24.6,27.6 h1.2
  text "A5" at 26.8,25.7 h1.2
  text "3" at 8.5,24.5 h5
  text "2" at 8.498,21 h5
  text "GND" at 34.5,19.5 h3
  text "CH1" at 15.5,18 h7 r90
  text "1" at 8.757,17 h5
  text "+12V" at 30.5,13.5 h5
  text "+" at 8.234,13 h7
Bottom Overlay:
  rectangle: 10,60 40,70
  text "MAC" at 27.5,58 h1.3
  text "Lyza v0.1" at 26.54,38.1 h4
  text "8ch 12V LED strip driver" at 30.652,36.297 h2
  text "(c) 2017 jaseg" at 23.696,34.787 h2
  text "CC-BY-SA" at 20.762,33 h2
Mechanical 1:
  the board outline again, w0.254
Mechanical 16:
  circle w0.254: c5,65 r2.1

## Dimensions
0,70 to 50,70 on Mechanical 16
50,70 to 50,0 on Mechanical 16
0,0 to 5,5 on Mechanical 16
45,5 to 5,5 on Mechanical 16
45,5 to 50,0 on Mechanical 16
45,5 to 45,65 on Mechanical 16
-2,12.5 to 0,0 on Mechanical 16
-2,12.5 to -2,31.5 on Mechanical 16
-2,31.5 to -2,38.5 on Mechanical 16
5,65 to -7,71 on Mechanical 16
50,0 to 52.43,12.5 on Mechanical 16
52.811,12.5 to 52.43,22.5 on Mechanical 16

## Text inside footprints (layer, text, board x,y; h text height)
C7: Top Overlay "+" at 37.238,51 h1.5 r270
M1: Bottom Overlay "TX" at 22.94,43.73 h1.3 r90; Bottom Overlay "PD" at 25.44,43.73 h1.3 r90; Bottom Overlay "RST" at 28.19,43.73 h1.3 r90; Bottom Overlay "VCC" at 30.69,43.73 h1.3 r90; Bottom Overlay "RX" at 30.69,51.73 h1.3 r90; Bottom Overlay "GPIO0" at 28.19,55.48 h1.3 r90; Bottom Overlay "GPIO2" at 25.44,55.48 h1.3 r90; Bottom Overlay "GND" at 23.19,53.23 h1.3 r90